# EAGLE board planeboard (EAGLE 7.5.0)
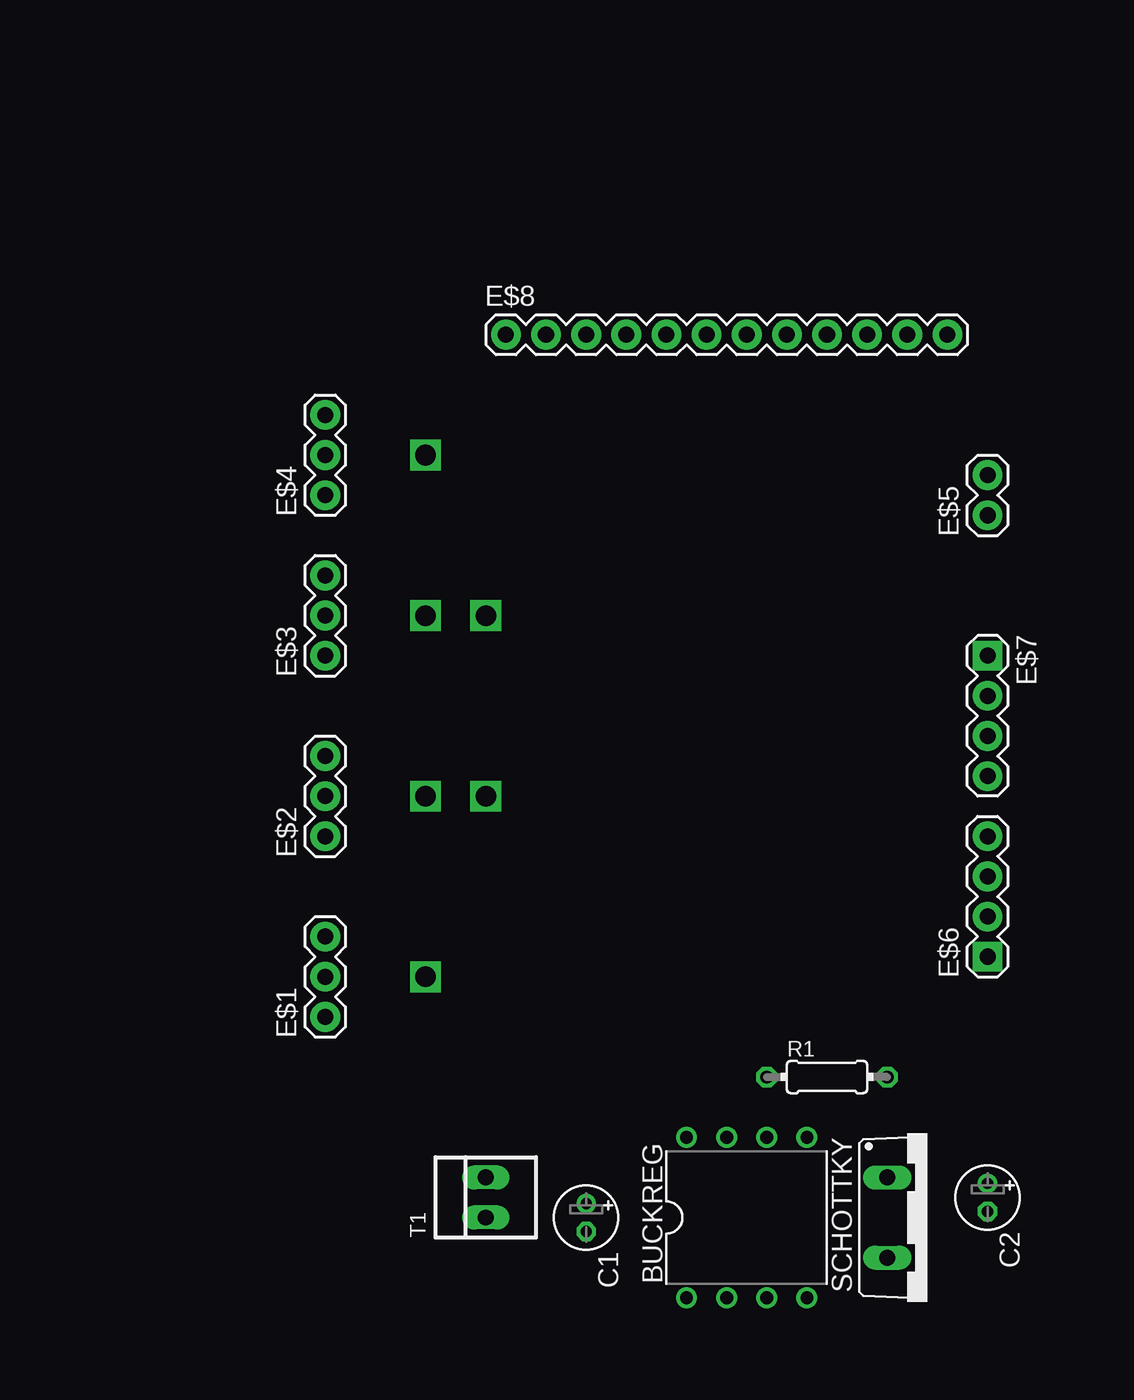
[diagram p0: board, top side]
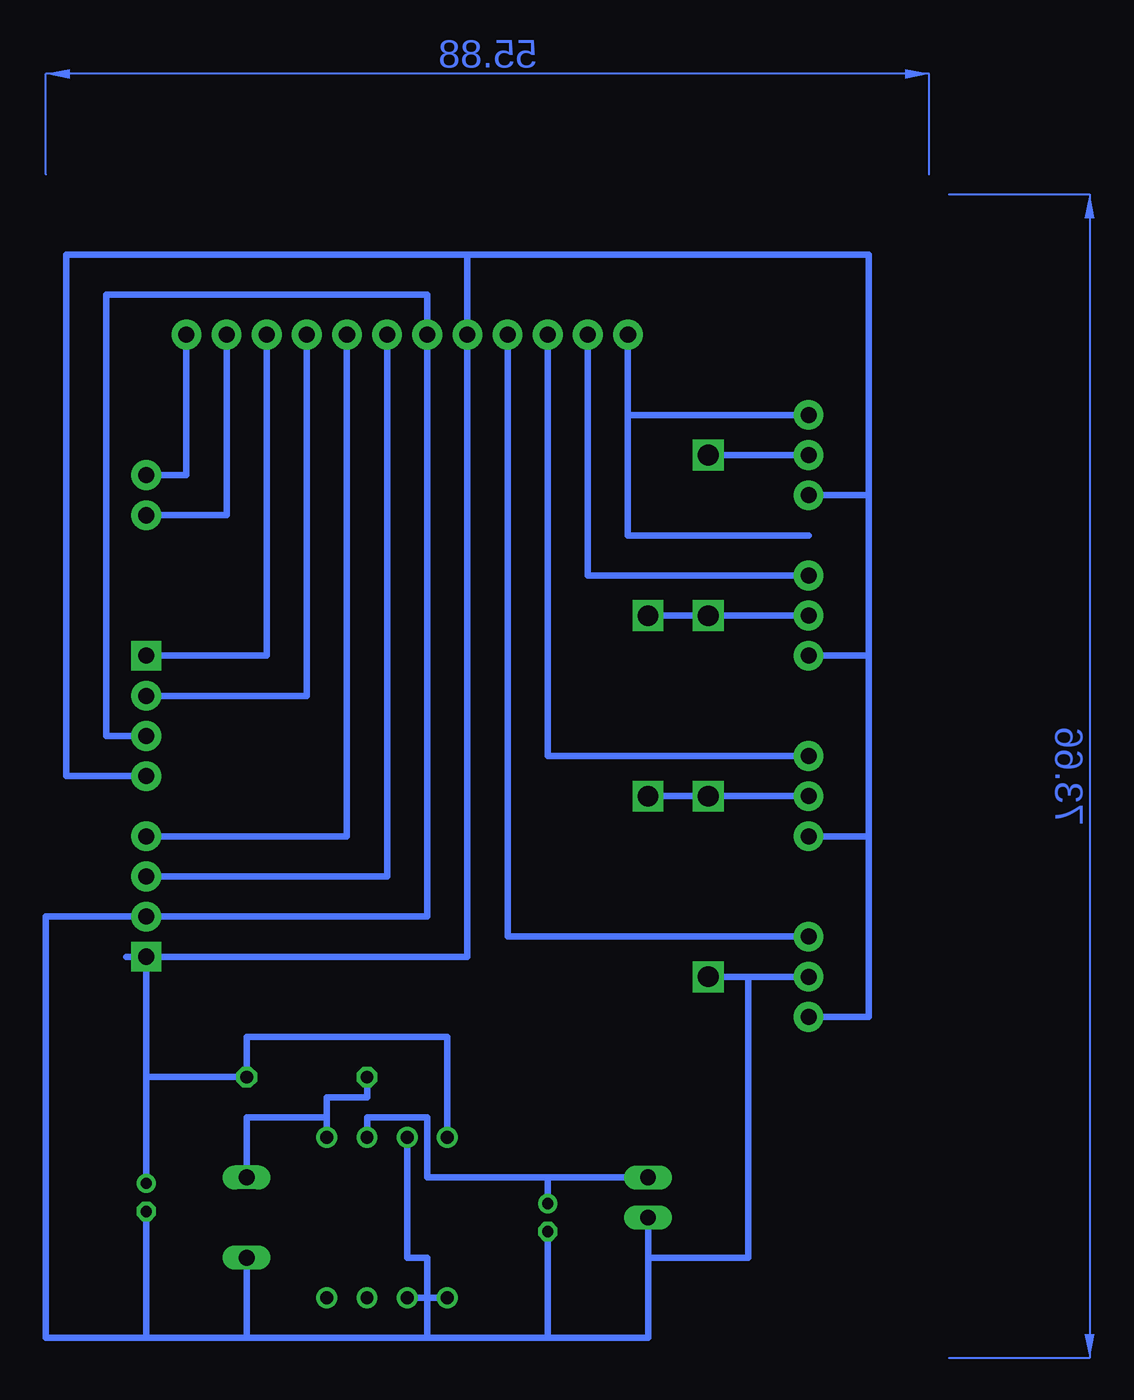
[diagram p1: board, bottom side, seen from below]

No outline drawn. Coordinates in mm, seen from the top.
Copper layers (1*16): Top 0.035mm / dielectric 1.5mm / Bottom 0.035mm
Design rules "default": minimum track width 10mil, minimum drill 24mil, track to track 8mil, track to pad 8mil, pad to pad 8mil, via to via 8mil, smd to smd 8mil, copper to edge 40mil, drill to drill 8mil, minimum pad ring 10mil, minimum via ring 8mil, stop-mask expansion 4mil, vias tented up to drill 0mil, thermal gap 10mil

## Footprints (pad centres in the part's own frame; a part is rotated, then mirrored left to right if it is on the bottom)
DIL08-400 = drill 0.813 pad 1.3: 1 -3.81,-5.08; 2 -1.27,-5.08; 3 1.27,-5.08; 4 3.81,-5.08; 5 3.81,5.08; 6 1.27,5.08; 7 -1.27,5.08; 8 -3.81,5.08
E1,8-4 = drill 0.711 pad 1.168: + -0.889,0 | drill 0.711 pad 1.168 octagon: - 0.889,0
1X03 = drill 1.016 pad 1.88: 1 0,0; 2 2.54,0; 3 5.08,0
1X02 = drill 1.016 pad 1.88: 1 0,0; 2 2.54,0
1X04 = drill 1.016 pad 1.88 square: 1 0,0 | drill 1.016 pad 1.88: 2 2.54,0; 3 5.08,0; 4 7.62,0
1X12 = drill 1.016 pad 1.88: 1 0,0; 2 2.54,0; 3 5.08,0; 4 7.62,0; 5 10.16,0; 6 12.7,0; 7 15.24,0; 8 17.78,0; 9 20.32,0; 10 22.86,0; 11 25.4,0; 12 27.94,0
0204/7 = drill 0.813 octagon: 1 -3.81,0; 2 3.81,0
BR210S = drill 1.016 long: T1 -2.54,-2.54; T2 2.54,-2.54
22-23-2021 = drill 1 long: 1 -1.27,0; 2 1.27,0

## Placement (x,y rotation side)
BUCKREG  [DIL08-400]  30.48,5.08 0 top
C1  22uf  [E1,8-4]  20.32,5.08 270 top
C2  220uf  [E1,8-4]  45.72,6.35 270 top
E$1  [1X03]  3.81,17.78 90 top
E$2  [1X03]  3.81,29.21 90 top
E$3  [1X03]  3.81,40.64 90 top
E$4  [1X03]  3.81,50.8 90 top
E$5  [1X02]  45.72,49.53 90 top
E$6  [1X04]  45.72,21.59 90 top
E$7  [1X04]  45.72,40.64 270 top
E$8  [1X12]  15.24,60.96 0 top
R1  330  [0204/7]  35.56,13.97 0 top
SCHOTTKY  [BR210S]  41.91,5.08 270 top
T1  [22-23-2021]  13.97,6.35 90 top

## Library data of the parts
BUCKREG = avago
C1 C2 = rcl
E$1-E$8 = SparkFun-Connectors
R1 = eagle-ltspice
SCHOTTKY = diode
T1 = con-molex

## Nets
S$1: E$3.2
S$2: E$5.2 E$8.12
S$3: BUCKREG.6 T1.2
S$4: BUCKREG.8 E$6.1 R1.2
S$5: E$5.1 E$8.11
S$6: BUCKREG.5 R1.1 SCHOTTKY.T1
S$7: E$6.3 E$8.7
S$8: E$7.1 E$8.10
S$9: E$7.2 E$8.9
S$10: E$6.4 E$8.8
S$11: E$1.1 E$2.1 E$3.1 E$4.1 E$7.4 E$8.5
S$12: E$1.3 E$8.4
S$13: E$2.3 E$8.3
S$14: E$3.3 E$8.2
S$15: E$4.3 E$8.1
S$16: BUCKREG.1 BUCKREG.2 BUCKREG.7 E$1.2 E$6.2 E$7.3 E$8.6 SCHOTTKY.T2 T1.1
S$19: E$4.2
S$20: E$2.2

## Tracks (layer width: path | path; a pad name or v marks a point on that pad's centre or on a via)
S$1  (via drill 1.3)
  Bottom 0.406: E$3.2 v10.16,43.18 v13.97,43.18
S$2
  Bottom 0.406: E$5.2 43.18,52.07 E$8.12
S$3
  Bottom 0.406: 20.32,7.62 27.94,7.62 27.94,11.43 31.75,11.43 BUCKREG.6 | 20.32,6.35 20.32,7.62 | 20.32,7.62 T1.2
S$4
  Bottom 0.406: BUCKREG.8 26.67,16.51 39.37,16.51 R1.2 45.72,13.97 | 45.72,7.62 45.72,13.97 | 45.72,13.97 E$6.1
S$5
  Bottom 0.406: E$5.1 40.64,49.53 E$8.11
S$6
  Bottom 0.406: SCHOTTKY.T1 39.37,11.43 34.29,11.43 | R1.1 31.75,12.7 34.29,12.7 34.29,11.43 | 34.29,11.43 BUCKREG.5
S$7
  Bottom 0.406: E$6.3 30.48,26.67 E$8.7
S$8
  Bottom 0.406: E$7.1 38.1,40.64 E$8.10
S$9
  Bottom 0.406: E$7.2 35.56,38.1 E$8.9
S$10
  Bottom 0.406: E$6.4 33.02,29.21 E$8.8
S$11
  Bottom 0.406: 46.99,21.59 25.4,21.59 E$8.5 25.4,66.04 | 25.4,66.04 50.8,66.04 50.8,33.02 E$7.4 | 25.4,66.04 0,66.04 0,50.8 | E$4.1 0,50.8 | 0,50.8 0,40.64 | E$3.1 0,40.64 | 0,40.64 0,29.21 | E$2.1 0,29.21 | 0,29.21 0,17.78 E$1.1
S$12
  Bottom 0.406: E$1.3 22.86,22.86 E$8.4
S$13
  Bottom 0.406: E$2.3 20.32,34.29 E$8.3
S$14
  Bottom 0.406: E$3.3 17.78,45.72 E$8.2
S$15
  Bottom 0.406: E$4.3 15.24,55.88 | 15.24,55.88 E$8.1 | 15.24,55.88 15.24,48.26 3.81,48.26
S$16  (via drill 1.3)
  Bottom 0.406: BUCKREG.7 29.21,2.54 27.94,2.54 27.94,0 | BUCKREG.1 27.94,0 | 45.72,-2.54 39.37,-2.54 | 39.37,-2.54 27.94,-2.54 | 27.94,-2.54 20.32,-2.54 | BUCKREG.2 27.94,0 | 27.94,0 27.94,-2.54 | SCHOTTKY.T2 39.37,-2.54 | 45.72,5.08 45.72,-2.54 | 20.32,3.81 20.32,-2.54 | 20.32,-2.54 13.97,-2.54 13.97,2.54 | 13.97,2.54 T1.1 | 45.72,-2.54 52.07,-2.54 52.07,24.13 E$6.2 27.94,24.13 E$8.6 27.94,63.5 48.26,63.5 48.26,35.56 E$7.3 | 13.97,2.54 7.62,2.54 7.62,20.32 | 7.62,20.32 E$1.2 | v10.16,20.32 7.62,20.32
S$19  (via drill 1.3)
  Bottom 0.406: v10.16,53.34 E$4.2
S$20  (via drill 1.3)
  Bottom 0.406: E$2.2 v10.16,31.75 v13.97,31.75
(copper drawn outside any net)
  shapes: Bottom area x2